# Altium PCB node.PcbDoc
Units mm, origin at the board's own origin, x right, y up, seen from the top; angles counter-clockwise.
Board outline 70.02 x 30.04 mm, 2 copper layers (Top Layer, Bottom Layer); 43 components, 58 nets, 180 pads, 49 vias.
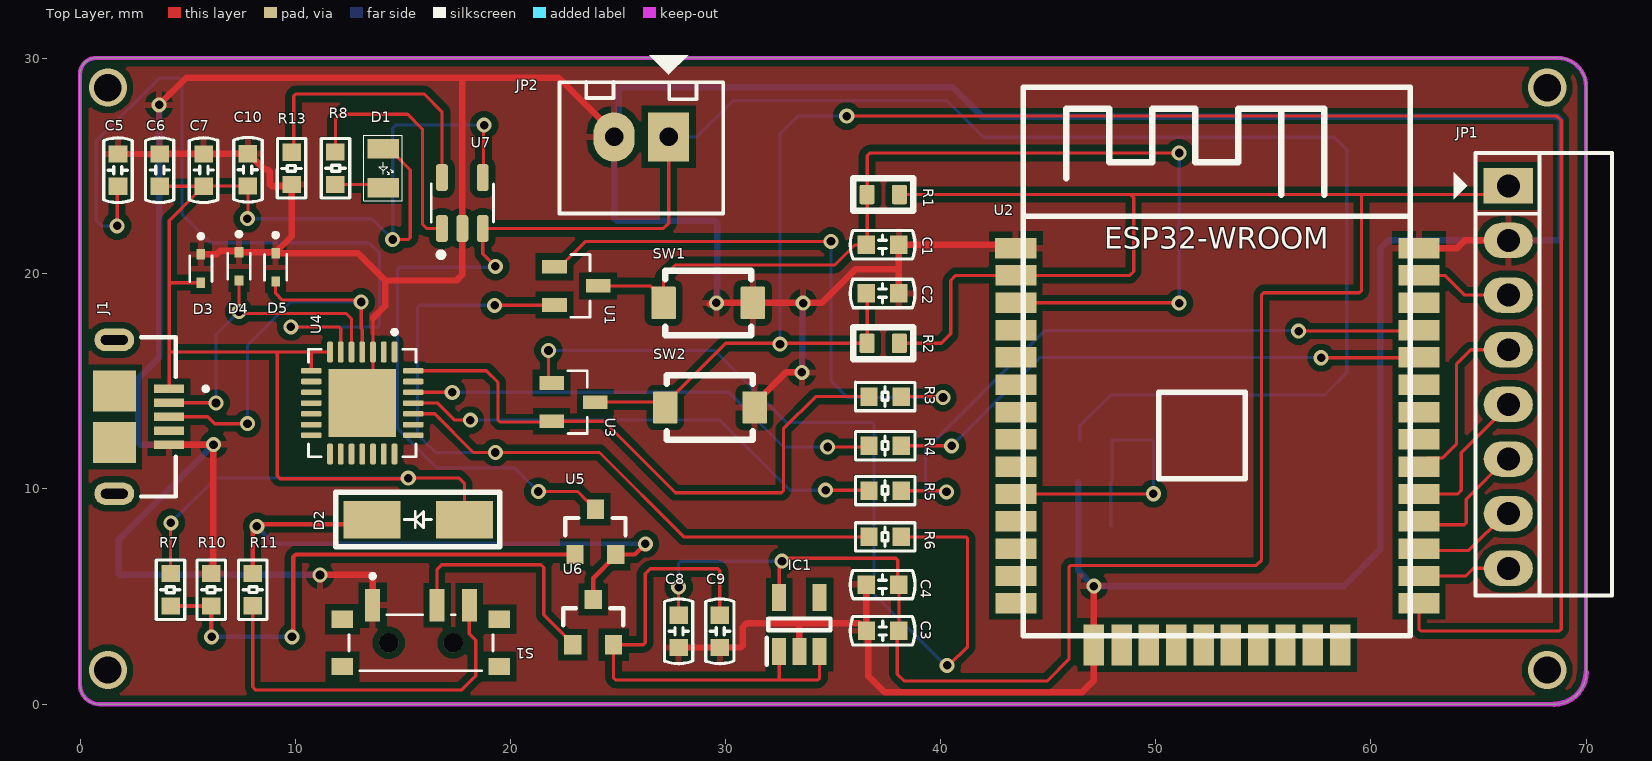
[diagram p0: Top Layer view]
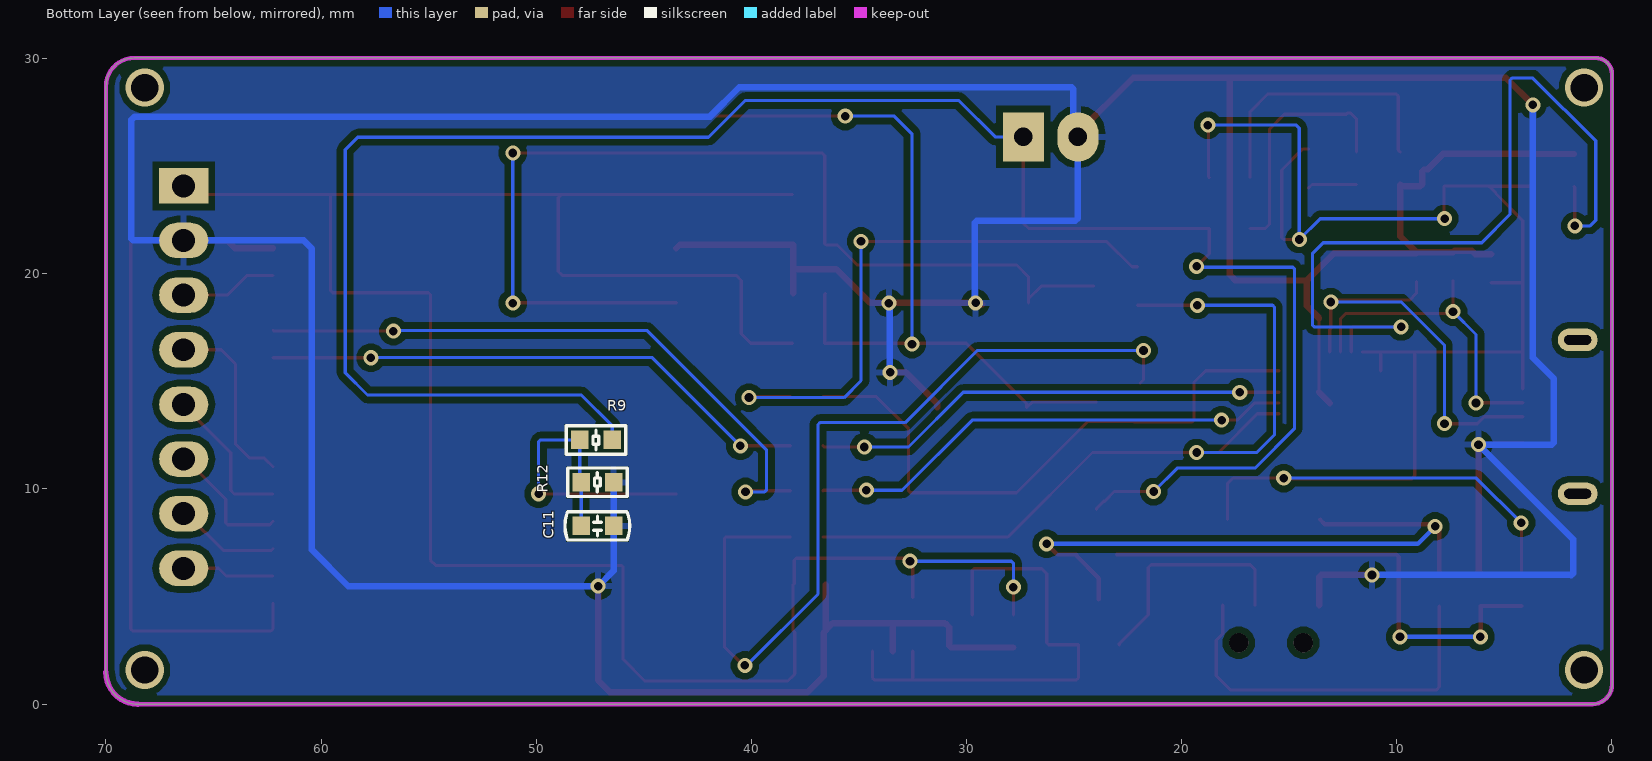
[diagram p1: Bottom Layer view, seen from below]
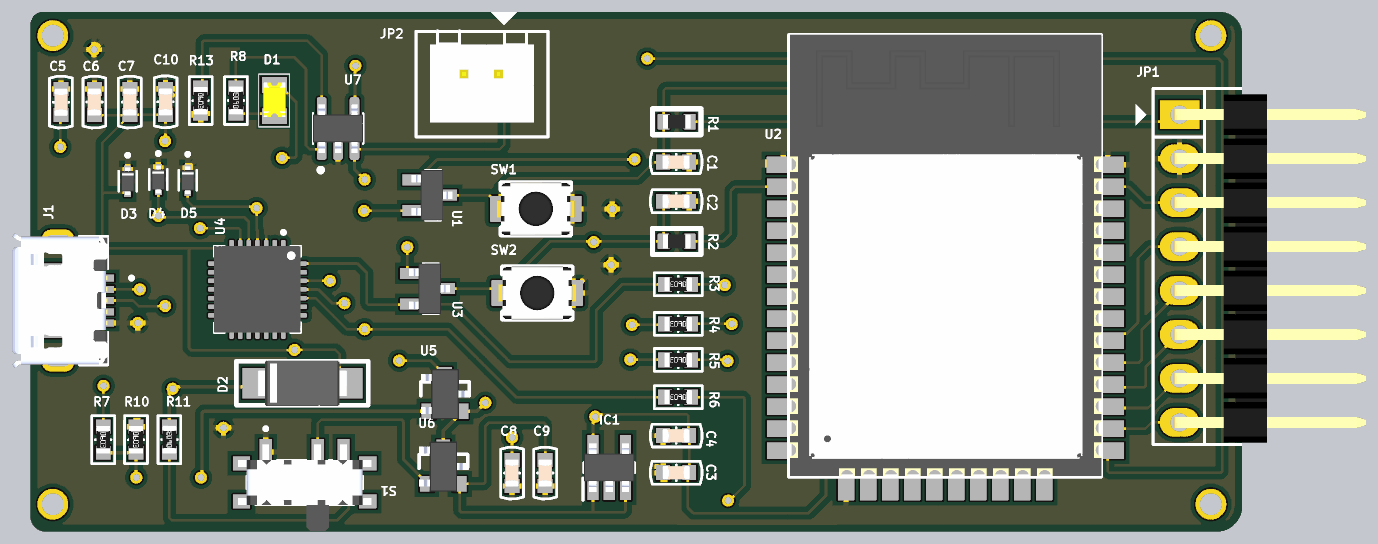
[diagram p2: 3D render of the assembled board from above, using the file's embedded part models]
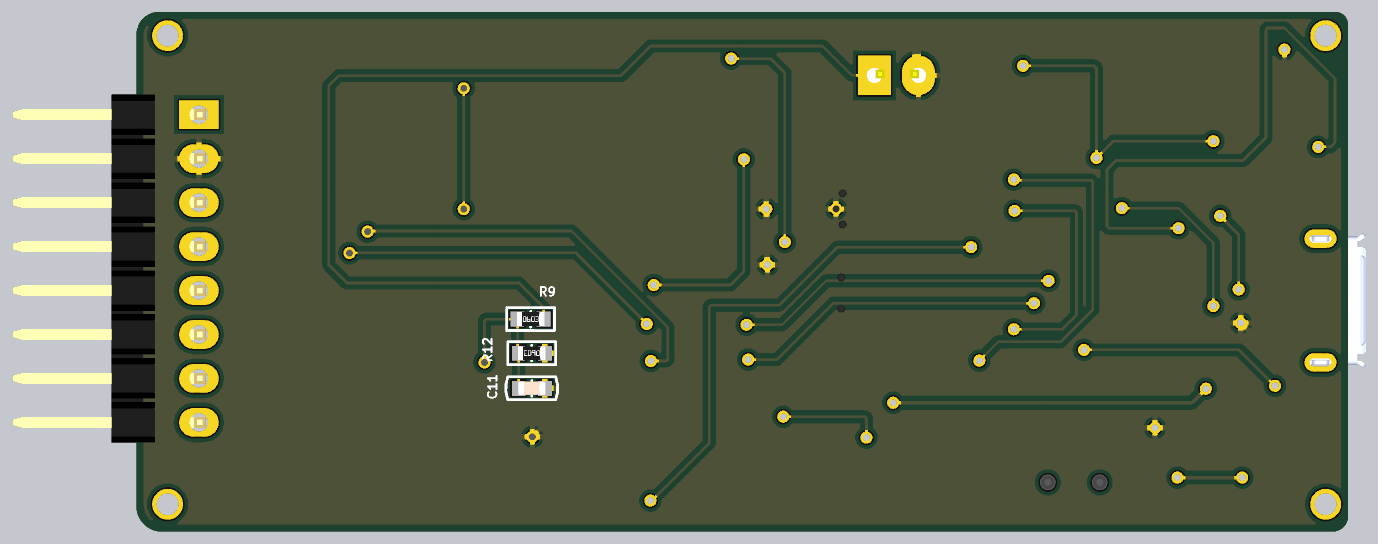
[diagram p3: 3D render of the assembled board from below, using the file's embedded part models]

## Layer stack, top to bottom
Top Solder: solder mask 0.0102, Solder Resist, Dk 3.5
Top Layer: signal copper 0.0356
Dielectric 1: dielectric 0.32, FR-4, Dk 4.8
Bottom Layer: signal copper 0.0356
Bottom Solder: solder mask 0.0102, Solder Resist, Dk 3.5

## Board outline
-0.019,0.91 -0.019,29.278 cw(c0.741,29.278) 0.741,30.038 68.674,30.038 cw(c68.674,28.712) 70,28.712 70,1.483 cw(c68.513,1.483) 68.513,-0.004 0.895,-0.004 cw(c0.895,0.91)

## Design rules (kind name [scope] priority, off if disabled: settings)
Clearance [All] p1: gap=0.3 ignorepadtopadclearanceinfootprint=FALSE
PolygonConnect [All] p1: connectstyle=Relief reliefconductorwidth=0.3 reliefentries=4 polygonreliefangle="90 Angle" airgapwidth=0.3
RoutingVias RoutingVias_Power [InNetClass('Power_class')] p1: holewidth=0.4 width=0.7 viastyle="Through Hole" minholewidth=0.4 minwidth=0.7 maxholewidth=0.6 maxwidth=1.1
RoutingVias [All] p2: holewidth=0.4 width=0.7 viastyle="Through Hole" minholewidth=0.4 minwidth=0.7 maxholewidth=0.4 maxwidth=0.7
SolderMaskExpansion [All] p1: expansion=0.102 istentingtop=FALSE
Width Width_Power [InNetClass('Power_class')] p1: maxlimit=2 minlimit=0.3 preferedwidth=0.5
Width Width_Signal [All] p2: maxlimit=0.5 minlimit=0.15 preferedwidth=0.15
30 further rules are at their usual default settings.

## Components (designator, comment, footprint, x,y, rotation, side; value= is the part's Value field where it differs from the comment)
C1 "0.1uF/50V(10%) 0603" "CAPACITOR 0603" 37.297,21.354 r180 top
C2 "0.1uF/50V(10%) 0603" "CAPACITOR 0603" 37.297,19.09 r180 top
C3 "22uF /10V 0603" "CAPACITOR 0603" 37.3,3.409 r0 top
C4 "0.1uF/50V 0603" "CAPACITOR 0603" 37.297,5.55 r180 top
C5 "1uF 0603" "CAPACITOR 0603" 1.753,24.818 r270 top
C6 "100nF 0603" "CAPACITOR 0603" 3.686,24.821 r90 top
C7 "10uF 0603" "CAPACITOR 0603" 5.731,24.821 r90 top
C8 "10uF /16V 0603" "CAPACITOR 0603" 27.814,3.384 r90 top
C9 "10uF /16V 0603" "CAPACITOR 0603" 29.73,3.384 r90 top
C10 "1uF 0603" "CAPACITOR 0603" 7.793,24.837 r270 top
C11 "100nF 0603" "CAPACITOR 0603" 47.152,8.285 r180 bottom
D1 "LED_0805_YELLOW" LED_0805_YELLOW 14.081,24.907 r180 top
D2 "BAT60B" DIODE_SMA 15.704,8.576 r90 top
D3 "LESD5D5.0CT1G" TVS_LESD5D5.0CT1G 5.605,20.247 r270 top
D4 "LESD5D5.0CT1G" TVS_LESD5D5.0CT1G 7.375,20.347 r270 top
D5 "LESD5D5.0CT1G" TVS_LESD5D5.0CT1G 9.078,20.303 r270 top
IC1 "RT9080-33GJ5" SOT94P280X100-5N 33.429,3.702 r90 top
J1 "USB3090-XX-X_REVE2" GCT_USB3090-XX-X_REVE2 1.58,13.353 r270 top
JP1 "JP8 PIN" JP8H 66.383,24.092 r270 top value=JP7
JP2 "JP2" CON2 27.353,26.365 r180 top value="Connector 2"
R1 "CR03JL7-1K" RESC1608L 37.328,23.685 r0 top value="1K, 1/10W"
R2 "CR03JL7-1K" RESC1608L 37.328,16.77 r0 top value="1K, 1/10W"
R3 "12K 0603" RESISTOR_0603 37.417,14.293 r180 top
R4 "0R 0603" RESISTOR_0603 37.417,12.004 r180 top
R5 "0R 0603" RESISTOR_0603 37.417,9.922 r180 top
R6 "12K 0603" RESISTOR_0603 37.417,7.77 r180 top
R7 "10K 0603" RESISTOR_0603 4.195,5.313 r270 top
R8 "3.3K 0603" RESISTOR_0603 11.86,24.908 r90 top
R9 "1M_0603" RESISTOR_0603 47.219,12.28 r180 bottom
R10 "100K 0603" RESISTOR_0603 6.088,5.313 r270 top
R11 "100K 0603" RESISTOR_0603 8.015,5.316 r90 top
R12 "1.3M_0603" RESISTOR_0603 47.152,10.309 r0 bottom
R13 "1K 0603" RESISTOR_0603 9.823,24.905 r270 top
S1 "SSSS811101" SW_SSSS811101 15.835,2.848 r0 top
SW1 "FLASH" "Button 3x4mm" 29.189,18.651 r0 top value="SW chip 2 pin"
SW2 "FLASH" "Button 3x4mm" 29.27,13.788 r0 top value="SW chip 2 pin"
U1 "S8050" J3Y 23.061,19.439 r270 top
U2 "ESP32-S" ESP32-S 53.19,12.254 r0 top
U3 "S8050" J3Y 22.928,14.037 r270 top
U4 "CP2102-GM" QFN50P500X500X100-29N 13.106,13.993 r270 top
U5 "AO3401" SOT23-3 23.945,7.952 r0 top
U6 "AO3401" SOT23-3 23.842,3.762 r0 top
U7 "TP4054 U1 SOT-23-5" SOT95P280X100-5N 17.762,23.292 r90 top

## Footprints (in the part's own frame and the unit in brackets; to place one, negate y for a bottom-side part, rotate by r counter-clockwise, add the part's x,y. Pads: shape width x height; smd on the part's side, far side on the other; paste and mask are expansions set on the pad)
"Button 3x4mm" [mm] "SMD 3x4mm"
  rrect10% 1.143x1.5 smd: 1(-2.075,0) 2(2.075,0)
  silkscreen extent -2,-1.5 2,1.5, body extent -2.25,-1.55 2.25,1.55, height 2.05
"CAPACITOR 0603" [mm]
  rect 0.806x0.864 smd: 1(-0.753,0) 2(0.753,0)
  silkscreen extent -1.5,-0.66 1.5,0.66, body extent -0.79,-0.4 0.81,0.4, height 0.81
CON2 [mil] "CON2"
  rect 75x90 hole 34: 1(0,0)
  oval 75x90 hole 34: 2(100,0)
  silkscreen extent -100,-150 200,140, body extent -68,-70 168,107, height 236
DIODE_SMA [mm] "Diode SMA"
  rect 1.75x2.65 smd: 1(0,-2.15) 2(0,2.15)
  silkscreen extent -1.27,-3.8 1.27,3.82, body extent -1.3,-2.6 1.3,2.6, height 2.2
ESP32-S [mil]
  rect 61x37.4 smd: 1(-389.27,351.61)
  rect 75x37.4 smd: 1(-382,352) 2(-382,302) 3(-382,252) 4(-382,202) 5(-382,152) 6(-382,102) 7(-382,52) 8(-382,2) 9(-382,-48) 10(-382,-98) 11(-382,-148) 12(-382,-198) 13(-382,-248) 14(-382,-298) 25(356,-298) 26(356,-248) 27(356,-198) 28(356,-148) 29(356,-98) 30(356,-48) 31(356,2) 32(356,52) 33(356,102) 34(356,152) 35(356,202) 36(356,252) 37(356,302) 38(356,352)
  rect 37.4x75 smd: 15(-239.11,-374) 16(-188.4,-374) 17(-138.3,-374) 18(-88.33,-374) 19(-38.34,-374) 20(11.64,-374) 21(61.72,-374) 22(111.63,-374) 23(161.82,-374) 24(211.66,-374)
  silkscreen extent -368,-357 340,647, body extent -366,-356 342,648, height 128
GCT_USB3090-XX-X_REVE2 [mm]
  rect 0.4x1.4 smd: 1(-1.3,2.55) 2(-0.65,2.55) 3(0,2.55) 4(0.65,2.55) 5(1.3,2.55)
  oval 1.05x1.85 hole 0.45 slot 1.25 at 90 deg: SH1(-3.575,0) SH4(3.575,0)
  rect 1.9x2 smd: SH2(-1.2,0) SH3(1.2,0)
  silkscreen extent -3.7,1.25 3.7,4.35, body extent -3.9,-2.64 3.9,2.86, height 2.71
J3Y [mil] "SOT-23-3"
  rect 25x45 smd: 1(-35,-40) 2(35,-40) 3(0,40)
  silkscreen extent -57,-10 58,25, body extent -57,-42 57,52, height 49
JP8H [mil]
  rect 65x90 hole 42: 1(0,0)
  oval 65x90 hole 42: 2(100,0) 3(200,0) 4(300,0) 5(400,0) 6(500,0) 7(600,0) 8(700,0)
  silkscreen extent -60,-100 750,190, body extent -46,-15 746,424, height 49
LED_0805_YELLOW [mm]
  rect 1.45x0.9 smd: 1(0,-0.9) 2(0,0.9)
  silkscreen extent -0.89,-1.53 0.9,1.52, body extent -0.63,-1.06 0.62,0.94, height 1.1
QFN50P500X500X100-29N [mm]
  rrect50% 0.97x0.26 smd: 1(-2.37,1.5) 2(-2.37,1) 3(-2.37,0.5) 4(-2.37,0) 5(-2.37,-0.5) 6(-2.37,-1) 7(-2.37,-1.5) 15(2.37,-1.5) 16(2.37,-1) 17(2.37,-0.5) 18(2.37,0) 19(2.37,0.5) 20(2.37,1) 21(2.37,1.5)
  rrect50% 0.26x0.97 smd: 8(-1.5,-2.37) 9(-1,-2.37) 10(-0.5,-2.37) 11(0,-2.37) 12(0.5,-2.37) 13(1,-2.37) 14(1.5,-2.37) 22(1.5,2.37) 23(1,2.37) 24(0.5,2.37) 25(0,2.37) 26(-0.5,2.37) 27(-1,2.37) 28(-1.5,2.37)
  rect 3.15x3.15 smd paste-0.585: 29(0,0)
  silkscreen extent -3.4,-2.5 2.5,2.5, body extent -2.5,-2.5 2.5,2.5, height 1
RESC1608L [mm] "Chip Resistor, Body 1.6x0.8mm, 1/10W 0603"
  rrect20% 0.7x0.9 smd: 1(-0.75,0) 2(0.75,0)
  silkscreen extent -1.4,-0.75 1.4,0.75, body extent -0.8,-0.4 0.8,0.4, height 0.45
RESISTOR_0603 [mm]
  rect 0.806x0.864 smd: 1(-0.753,0) 2(0.753,0)
  silkscreen extent -1.38,-0.66 1.38,0.66, body extent -0.79,-0.4 0.81,0.4, height 0.47
SOT23-3 [mm]
  rect 0.8x0.9 smd: 1(-0.95,-1) 2(0.95,-1) 3(0,1.1)
  silkscreen extent -1.4,-0.1 1.4,0.7, body extent -1.4,-1.45 1.4,1.45, height 1.25
SOT94P280X100-5N [mm]
  rect 1.25x0.65 smd: 1(-1.25,0.94) 2(-1.25,0) 3(-1.25,-0.94) 4(1.25,-0.94) 5(1.25,0.94)
  silkscreen extent -1.88,-1.45 0.28,1.51, body extent -1.4,-1.45 1.4,1.45, height 1
SOT95P280X100-5N [mm]
  rrect50% 1.26x0.55 smd: 1(-1.185,0.95) 2(-1.185,0) 3(-1.185,-0.95) 4(1.185,-0.95) 5(1.185,0.95)
  silkscreen extent -2.45,-1.45 0.88,1.45, body extent -1.4,-1.45 1.4,1.45, height 1
SW_SSSS811101 [mm]
  rect 0.7x1.5 smd: 1(-2.25,1.75) 2(0.75,1.75) 3(2.25,1.75)
  rect 1x0.8 smd: SH1(-3.65,1.1) SH2(3.65,1.1) SH3(-3.65,-1.1) SH4(3.65,-1.1)
  round 0.9 hole 0.9 unplated: ""(-1.5,0) ""(1.5,0)
  silkscreen extent -3.35,-1.3 3.35,3.2, body extent -3.85,-2.8 3.85,2.2, height 1.4
TVS_LESD5D5.0CT1G [mm]
  rect 0.48x0.4 smd: 1(-0.66,0) 2(0.66,0)
  silkscreen extent -1.6,-0.52 0.6,0.52, body extent -0.8,-0.4 0.8,0.4, height 0.7

## Part data
C1 C2 C3 C4 C5 C6 C7 C8 C9 C10 C11: library part "CAPACITOR 0603", "Generic Capacitor 0603, 1.6x0.8x0.9mm."
D1: "LED 0805 Yellow.", JLCPCB PN=C84261
D2: library part US1M, "High Efficient Recovery Rectifier 1000V 1A SMA", JLCPCB PN=C330229, ComponentLink1Description=Datasheet, Digikey PN=4617-US1MTR-ND, Mouser PN=821-US1M
D3 D4 D5: "Transient Voltage Suppressors for ESD Protection", Package=None, Availability="Not in stock", Check_prices=https://www.snapeda.com/parts/LESD5D5.0CT1G/Leshan+Radio+Co./view-part/?ref=eda, MF="Leshan Radio Co.", MP=LESD5D5.0CT1G, Price=None, SnapEDA_Link=https://www.snapeda.com/parts/LESD5D5.0CT1G/Leshan+Radio+Co./view-part/?ref=snap
IC1: "Linear Voltage Regulator IC Positive Fixed 1 Output 600mA TSOT-23-5", Package="TSOT-23 Richtek", Check_prices=https://www.snapeda.com/parts/RT9080-33GJ5/Richtek+USA+Inc./view-part/?ref=eda, MF="Richtek USA", MP=RT9080-33GJ5, SnapEDA_Link=https://www.snapeda.com/parts/RT9080-33GJ5/Richtek+USA+Inc./view-part/?ref=snap
J1: "USB - micro AB USB 2.0 Receptacle Connector 5 Position Surface Mount, Right Angle; Through Hole, 2.35mm profile, 5 Pins, Horizontal, Bottom mount", Package=None, Check_prices=https://www.snapeda.com/parts/USB3090-30-A/Global+Connector+Technology/view-part/?ref=eda, MF="Global Connector Technology", MP=USB3090-30-A, SnapEDA_Link=https://www.snapeda.com/parts/USB3090-30-A/Global+Connector+Technology/view-part/?ref=snap
JP1: library part JP8
JP2: library part Con2, "Connector 2"
R1 R2: "RES CR 0603 5% 1/10W 1K", ComponentLink1Description=Datasheet, ComponentLink1URL="D:\Dropbox\Datasheets\Passive Components\Resistors\Thick Film Chip Resistor CR.pdf", Unit Price=0.000483
R3 R4 R5 R6 R7 R8 R9 R10 R11 R12 R13: library part RESISTOR_0603, "Generic Resistor 0603."
S1: "Switch Slide SP Side Slide 0.3A 5VDC 10000Cycles Gull Wing SMD T/R", Package=None, Check_prices=https://www.snapeda.com/parts/SSSS811101/ALPS/view-part/?ref=eda, MF=ALPS, MP=SSSS811101, SnapEDA_Link=https://www.snapeda.com/parts/SSSS811101/ALPS/view-part/?ref=snap
SW1 SW2: library part SW2_1, "Switch button 2 pin"
U1 U3: library part J3Y, "TRANSISTOR BIPOLAR (BJT) NPN 25V 500mA SOT-23-3", JLCPCB PN=C2828466, ComponentLink1Description=Datasheet, ComponentLink1URL=https://media.digikey.com/pdf/Data%20Sheets/UTD%20Semi%20PDFs/S8050.pdf, Digikey PN=4518-S8050CT-ND
U4: "USB Bridge, USB to UART USB 2.0 UART Interface 28-QFN (5x5)", Package="QFN-28 Silicon Labs", Check_prices=https://www.snapeda.com/parts/CP2102-GM/Silicon+Labs/view-part/?ref=eda, MF="Silicon Labs", MP=CP2102-GM, SnapEDA_Link=https://www.snapeda.com/parts/CP2102-GM/Silicon+Labs/view-part/?ref=snap
U5 U6: "P-Channel 30 V 4A (Ta) 1.4W (Ta) Surface Mount SOT-23-3", Package="SOT-23-3 Alpha &amp; Omega Semiconductor", Check_prices=https://www.snapeda.com/parts/AO3401/Alpha/view-part/?ref=eda, MF="Alpha & Omega Semiconductor", MP=AO3401, SnapEDA_Link=https://www.snapeda.com/parts/AO3401/Alpha/view-part/?ref=snap
U7: library part LTC4054ES5-4.2#TRMPBF, "Standalone Linear Li-Ion Battery Charger with Thermal Regulation in ThinSOT", Package="SOT-5 Analog Devices", Check_prices=https://www.snapeda.com/parts/LTC4054ES5-4.2%23TRMPBF/Analog+Devices/view-part/?ref=eda, MF="Analog Devices", MP=LTC4054ES5-4.2#TRMPBF, SnapEDA_Link=https://www.snapeda.com/parts/LTC4054ES5-4.2%23TRMPBF/Analog+Devices/view-part/?ref=snap

## Via types
v1: diameter 0.7, hole 0.4, Top Layer to Bottom Layer, 45 vias
v2: diameter 1.778, hole 1.27, Top Layer to Bottom Layer, 4 vias

## Nets (pads, with @x,y where several pads share a name; then routed paths per layer and width w, separated by ;. In a path a pad name is that pad's centre, name@x,y a point inside that pad or via, vN(x,y) a via of type N, cw(c..) or ccw(c..) an arc to the next point about the centre after c; other vN are vias at no path point)
#EN: C1.2 R1.1 SW1.1 U1.3 U2.3 | length 48.1
  Top Layer w0.15: U1.3 26.504,19.439 SW1.1@27.114,18.829 ; SW1.1 SW1.1@27.114,18.829 ; U2.3 51.257,18.655 51.274,18.638 v1@51.292,18.621 ; v1(51.083,25.615) 36.698,25.615 36.578,25.495 R1.1 36.578,21.388 36.531,21.341 36.004,21.341 35.075,20.412 27.663,20.412 27.114,19.864 SW1.1@27.114,18.829
  Bottom Layer w0.15: v1(51.083,25.615) 51.083,18.978 51.274,18.787 v1@51.274,18.638
  other v1: 51.083,18.638
BUSY: JP1.8 U2.26 | length 4.3
  Top Layer w0.15: U2.26 64.409,5.955 64.766,6.312 JP1.8
CMD: U2.19
CS: JP1.5 U2.29 | length 6.9
  Top Layer w0.15: U2.29 64.031,9.765 64.2,9.934 64.2,11.679 66.383,13.861 JP1.5
CTS: U4.23
D/C: JP1.6 U2.28 | length 6.1
  Top Layer w0.15: U2.28 62.393,8.334 64.345,8.334 64.433,8.422 64.433,9.53 66.295,11.392 JP1.6
DCD: U4.1
DSR: U4.27
DTR: R3.2 U3.2 U4.28 | length 28.4
  Top Layer w0.15: U4.28 18.879,15.493 19.418,14.954 19.418,13.199 19.506,13.111 21.912,13.111 U3.2@22.204,13.111 ; U3.2 22.204,13.148 24.345,13.148 27.67,9.823 32.597,9.823 32.684,9.911 32.684,12.793 34.185,14.293 R3.2
GND: C1.1 C2.1 C3.1 C4.2 C5.1 C6.2 C7.2 C8.1 C9.1 C10.1 C11.2 D3.1 D4.1 D5.1 IC1.2 J1.5 JP1.2 JP2.2 R10.1 R12.1 R13.2 S1.1 SW1.2 SW2.2 U2.1 U2.15 U2.38 U4.3 U4.29 U7.2 | length 277.5
  Top Layer w0.15: U4.29@13.606,14.493 U4.3 13.606,17.943
  Top Layer w0.3: C5.1 3.683,25.571 C6.2 C7.2 7.777,25.574 C10.1 7.822,25.59 8.561,24.851 8.72,24.851 8.807,24.763 8.807,24.156 8.897,24.066 9.738,24.066 R13.2 9.823,21.749 9.078,21.003 D5.1 ; v1(3.663,27.855) 4.93,29.122 17.695,29.122 ; J1.5 6.182,12.053 v1(6.189,12.061) 6.189,6.168 R10.1 ; D3.1 6.346,20.907 6.516,21.077 7.305,21.077 D4.1 9.033,21.007 D5.1 ; v1(11.143,6.001) 13.497,6.001 13.585,5.914 S1.1 ; U4.29 U4.29@13.606,14.493 ; 13.606,17.943 14.182,18.52 14.182,19.69 ; JP2.2 24.813,26.555 22.246,29.122 17.695,29.122 ; C8.1 C9.1 30.707,2.631 30.794,2.718 30.794,3.565 30.995,3.766 33.517,3.766 ; v1@29.271,18.587 29.334,18.651 SW1.2 34.477,18.651 36.048,20.222 38.05,20.222 ; SW2.2 31.345,13.967 32.808,15.429 33.527,15.429 v1(33.54,15.417) ; IC1.2 33.429,3.678 33.517,3.766 ; C4.2 C3.1@36.544,3.441 ; C2.1 38.05,20.222 ; U2.1@43.487,21.195 43.328,21.354 C1.1 38.05,20.222 ; v1(47.117,5.482) U2.15 47.117,1.096 46.567,0.546 37.388,0.546 36.639,1.294 36.639,3.317 C3.1 36.544,3.412 C3.1@36.544,3.441 ; U2.38 64.004,21.195 64.361,21.552 JP1.2 ; D5.1 12.909,20.963 14.182,19.69 ; 14.182,19.69 17.492,19.69 17.762,19.96 U7.2 17.762,29.056 17.695,29.122 ; 33.517,3.766 36.219,3.766 C3.1@36.544,3.441
  Bottom Layer w0.3: v1@3.682,27.874 v1(3.663,27.855) 3.663,16.102 2.695,15.134 2.695,12.149 2.783,12.061 v1(6.189,12.061) 1.795,7.667 1.795,6.073 1.875,5.993 1.883,6.001 v1(11.143,6.001) ; v1(29.571,18.648) 29.599,18.675 29.599,22.379 29.511,22.467 24.94,22.467 24.813,22.595 JP2.2 25.023,26.575 25.023,28.584 25.111,28.672 40.551,28.672 41.913,27.31 68.663,27.31 68.812,27.161 68.812,21.64 68.724,21.552 JP1.2 60.802,21.552 60.428,21.178 60.428,7.181 58.728,5.482 v1(47.117,5.482) 46.399,6.2 R12.1 ; v1(33.54,15.417) 33.571,15.448 33.571,18.606 v1(33.603,18.637)
IO0: C2.2 R2.1 SW2.1 U2.25 U3.3 | length 94.6
  Top Layer w0.15: U3.3 26.946,14.037 SW2.1 27.195,13.967 29.998,16.77 R2.1 36.578,19.056 C2.2 ; v1@35.516,27.47 35.653,27.333 68.635,27.333 68.841,27.127 68.841,3.484 68.753,3.396 62.32,3.396 62.233,3.484 U2.25
  Bottom Layer w0.15: v1(32.529,16.735) 32.529,26.513 33.349,27.333 v1(35.629,27.333)
IO2: U2.24
IO12: U2.14
IO13: U2.16
IO14: U2.13
IO15: U2.23
IO19: U2.31
IO21: U2.33
IO22: U2.36
IO25: C11.1 R9.1 R12.2 U2.10 | length 14.8
  Top Layer w0.15: U2.10 49.872,9.765 v1(49.885,9.778) v1@49.898,9.79
  Bottom Layer w0.15: C11.1 R12.2 47.972,10.376 R9.1 49.797,12.28 49.885,12.192 v1(49.885,9.778)
IO26: U2.11
IO27: U2.12
IO32: U2.8
IO33: U2.9
IO34: U2.6
IO35: U2.7
IO36: U2.4
IO39: U2.5
MOSI: JP1.3 U2.37 | length 4.5
  Top Layer w0.15: U2.37 63.437,19.925 64.351,19.012 JP1.3
NC: U2.32
NetC5_2: C5.2 U4.6 | length 39
  Top Layer w0.15: v1(1.712,22.228) 1.712,24.024 C5.2 ; v1@9.781,17.541 v1(9.787,17.534) 12.018,17.534 12.106,17.446 U4.6
  Bottom Layer w0.15: v1(1.712,22.228) 1.004,22.228 0.745,22.488 0.745,26.184 3.661,29.101 4.639,29.101 4.727,29.013 4.727,22.762 6.042,21.446 13.404,21.446 13.914,20.936 13.914,17.622 13.827,17.534 v1(9.787,17.534)
NetD1_2: D1.2 R8.1 | length 2.3
  Top Layer w0.15: R8.1 13.933,24.155 D1.2
NetD2_2: D2.2 R11.2 U5.2 U6.3 | length 30.5
  Top Layer w0.2: R11.2 8.015,8.243 8.132,8.361 13.339,8.361 D2.2 ; U6.3 23.842,5.849 24.895,6.902 U5.2 25.773,6.952 v1(26.268,7.447)
  Bottom Layer w0.2: v1@8.152,8.339 8.205,8.285 v1(8.205,8.259) 9.016,7.447 v1(26.268,7.447)
NetR3_1: R3.1 U1.1 | length 27.3
  Top Layer w0.15: U1.1 22.299,20.328 23.471,21.5 34.89,21.5 v1(34.898,21.508) ; R3.1 40.061,14.293 v1(40.104,14.249)
  Bottom Layer w0.15: v1(34.898,21.508) 34.898,15.036 35.685,14.249 v1(40.104,14.249)
NetR6_1: R6.1 U3.1 | length 40.2
  Top Layer w0.15: v1(21.763,16.438) 21.763,15.075 U3.1 ; R6.1 41.159,7.77 41.247,7.683 41.247,2.666 40.376,1.796 v1(40.295,1.796)
  Bottom Layer w0.15: v1(21.763,16.438) 29.493,16.438 32.846,13.085 36.81,13.085 36.898,12.997 36.898,5.112 40.214,1.796 v1(40.295,1.796)
NetR7_2: R7.2 R10.2 U5.1 | length 23.8
  Top Layer w0.2: R7.2 R10.2 6.088,3.143 v1(6.106,3.125) ; v1@9.783,3.25 9.9,3.367 9.9,6.835 10.017,6.952 U5.1
  Bottom Layer w0.2: v1(6.106,3.125) v1(9.841,3.125)
NetR8_2: R8.2 U7.1 | length 11.4
  Top Layer w0.15: R8.2 11.86,27.189 12.152,27.481 12.276,27.481 12.336,27.422 15.214,27.422 15.907,26.728 15.907,22.307 16.108,22.107 U7.1
NetR11_1: R11.1 S1.3 | length 17.9
  Top Layer w0.15: R11.1 8.015,0.793 8.157,0.651 17.712,0.651 18.381,1.321 18.381,2.968 18.085,3.264 S1.3
NetR13_1: R13.1 U7.5 | length 13
  Top Layer w0.15: R13.1 9.918,25.752 9.918,28.273 10.006,28.361 15.988,28.361 16.812,27.538 U7.5
NetS1_2: S1.2 U6.1 | length 10.9
  Top Layer w0.15: S1.2 16.585,6.259 16.803,6.477 21.418,6.477 21.545,6.35 21.545,4.159 22.892,2.812 U6.1
RES: JP1.7 U2.27 | length 4.9
  Top Layer w0.15: U2.27 62.315,7.142 64.549,7.142 66.259,8.852 JP1.7
RI: U4.2
RTS: R6.2 U1.2 U4.24 | length 39.9
  Top Layer w0.15: U4.24 16.475,13.493 18.273,11.695 v1(19.296,11.695) 24.135,11.695 28.06,7.77 R6.2 ; v1(19.257,18.537) 22.032,18.537 U1.2
  Bottom Layer w0.15: v1(19.257,18.537) 15.764,18.537 15.676,18.449 15.676,12.514 16.495,11.695 v1(19.296,11.695)
RXD: R5.2 U4.25 | length 22.9
  Top Layer w0.15: U4.25 16.611,13.993 17.405,13.2 v1(18.13,13.2) ; v1(34.647,9.941) 36.644,9.941 R5.2
  Bottom Layer w0.15: v1(18.13,13.2) 29.734,13.2 32.992,9.941 v1(34.647,9.941)
RXD0: R4.1 U2.34 | length 25.8
  Top Layer w0.15: R4.1 v1(40.507,12.004) v1@40.527,12.023 ; v1(57.685,16.098) 62.216,16.098 U2.34
  Bottom Layer w0.15: v1(40.507,12.004) 44.618,16.115 57.668,16.115 v1(57.685,16.098)
SCK: JP1.4 U2.30 | length 8.6
  Top Layer w0.15: U2.30 62.632,11.435 63.32,11.435 63.979,12.093 63.979,15.813 64.637,16.472 JP1.4
SD0: U2.21
SD1: U2.22
SD2: U2.17
SD3: U2.18
TXD: R4.2 U4.26 | length 22.4
  Top Layer w0.15: U4.26 v1(17.289,14.493) v1@17.296,14.486 ; v1(34.74,11.951) 36.611,11.951 R4.2
  Bottom Layer w0.15: v1(17.289,14.493) 30.149,14.493 32.69,11.951 v1(34.74,11.951) 34.828,12.039 v1@34.828,12.055
TXD0: R5.1 U2.35 | length 30.3
  Top Layer w0.15: R5.1 40.206,9.922 v1(40.266,9.862) ; v1(56.635,17.337) 62.184,17.337 U2.35
  Bottom Layer w0.15: v1(40.266,9.862) 39.382,9.862 39.285,9.959 39.285,11.807 44.85,17.372 56.6,17.372 v1(56.635,17.337)
USB_DN: D4.2 J1.2 U4.5 | length 15.2
  Top Layer w0.15: J1.2 6.301,14.003 v1(6.309,13.995) ; D4.2 v1(7.375,18.245) 7.463,18.157 12.365,18.157 12.606,17.917 U4.5
  Bottom Layer w0.15: v1(6.309,13.995) 6.309,17.179 v1(7.375,18.245)
USB_DP: D5.2 J1.3 U4.4 | length 20.6
  Top Layer w0.15: J1.3 5.925,13.353 6.245,13.034 v1(7.771,13.034) ; D5.2 9.078,19.096 9.393,18.78 12.968,18.78 v1(13.056,18.693) 13.056,17.462 13.106,17.412 U4.4
  Bottom Layer w0.15: v1(7.771,13.034) 7.771,16.686 9.778,18.693 v1(13.056,18.693)
VBAT: JP2.1 R9.2 U5.3 U7.3 | length 95.3
  Top Layer w0.15: v1(19.298,20.344) 18.712,20.931 U7.3 27.108,22.107 27.353,22.351 JP2.1 ; v1(21.291,9.88) 23.117,9.88 23.57,9.427 23.62,9.427 23.945,9.102 U5.3
  Bottom Layer w0.15: v1@19.339,20.384 v1(19.298,20.344) 19.258,20.304 14.828,20.304 14.741,20.216 14.741,12.813 16.583,10.97 20.201,10.97 v1(21.291,9.88) ; JP2.1 28.66,26.365 30.354,28.058 40.281,28.058 41.988,26.352 58.297,26.352 58.877,25.772 58.877,15.405 57.84,14.368 47.896,14.368 46.466,12.937 R9.2
VCC: C6.1 C7.1 C10.2 D1.1 D2.1 D3.2 J1.1 R7.1 U4.7 U4.8 U7.4 | length 81
  Top Layer w0.15: C6.1 C7.1@5.702,24.068 ; J1.1 4.13,16.333 ; R7.1 4.195,8.41 v1(4.21,8.425) ; D3.2 4.218,19.587 4.13,19.499 ; v1(7.769,22.563) 7.793,22.587 C10.2 5.747,24.084 C7.1 C7.1@5.702,24.068 ; U4.8 10.736,16.34 10.713,16.363 ; U4.7 10.713,16.363 ; D1.1 14.356,25.807 15.335,24.828 15.335,21.684 15.247,21.596 v1(14.52,21.596) v1@14.451,21.665 ; D2.1 17.854,10.256 17.606,10.503 v1(15.246,10.503) 15.216,10.474 9.294,10.474 9.151,10.618 9.151,16.363 ; U7.4 18.74,24.505 18.74,26.886 v1(18.769,26.915) ; 4.13,16.333 4.13,19.499 ; 4.13,16.333 4.16,16.363 9.151,16.363 ; 4.13,19.499 4.13,22.467 5.374,23.711 5.374,23.74 C7.1@5.702,24.068 ; 9.151,16.363 10.713,16.363
  Bottom Layer w0.15: v1(4.21,8.425) 6.288,10.503 v1(15.246,10.503) ; v1(7.769,22.563) 13.554,22.563 v1(14.52,21.596) 14.52,26.772 14.663,26.915 v1(18.769,26.915)
VDD3V3: C3.2 C4.1 C8.2 IC1.5 JP1.1 R1.2 R2.2 U2.2 | length 109.1
  Top Layer w0.15: C8.2 v1(27.814,5.436) v1@27.817,5.439 ; IC1.5 32.489,6.509 v1(32.622,6.641) 32.754,6.774 37.909,6.774 37.997,6.686 37.997,5.603 C4.1 38.053,5.547 C3.2 37.974,3.33 37.974,1.393 38.296,1.071 44.949,1.071 45.956,2.079 45.956,6.356 46.044,6.444 54.667,6.444 54.916,6.693 ; R2.2 40.022,16.77 40.462,17.21 40.462,19.69 40.697,19.925 U2.2 48.785,19.925 48.968,20.108 48.968,23.541 48.824,23.685 ; R1.2 48.824,23.685 ; 54.916,6.694 54.916,19.037 55.004,19.125 59.466,19.125 59.554,19.213 59.554,23.685 ; JP1.1 65.976,23.685 59.554,23.685 ; 48.824,23.685 59.554,23.685
  Bottom Layer w0.15: v1(27.814,5.436) 27.814,6.553 27.902,6.641 v1(32.622,6.641)
VHI: C9.2 IC1.1 IC1.3 U6.2 | length 24.2
  Top Layer w0.15: C9.2 29.73,6.205 29.642,6.293 26.487,6.293 26.259,6.064 26.259,2.85 26.171,2.762 U6.2 24.792,1.208 24.88,1.121 32.489,1.121 ; IC1.1 32.489,1.121 ; IC1.3 34.369,1.208 34.281,1.121 32.489,1.121
pads on no net: IC1.4 J1.4 J1.SH1 J1.SH2 J1.SH3 J1.SH4 S1. S1.SH1 S1.SH2 S1.SH3 S1.SH4 U2.20 U4.9 U4.10 U4.11 U4.12 U4.13 U4.14 U4.15 U4.16 U4.17 U4.18 U4.19 U4.20 U4.21 U4.22
copper on no net:
  other v2: 1.282,1.584 68.194,1.584 1.282,28.657 68.194,28.657

## Polygon pours and split planes (outlines as drawn)
GND on Bottom Layer "GND_L02_P000" (solid, remove dead copper, pour order 0): 70,0 70,30 0,30 0,0
GND on Top Layer "GND_L01_P001" (solid, remove dead copper, pour order 1): 0,0 70,0 70,30 0,30

## Keep-outs
Keep-Out Layer:
  lines w0.2: 68.513,-0.004 0.895,-0.004 cw(c0.895,0.91) -0.019,0.91 -0.019,29.278 cw(c0.741,29.278) 0.741,30.038 23.944,30.038 68.674,30.038 cw(c68.674,28.712) 70,28.712 70,1.483
  lines w0.254: 68.513,-0.004 ccw(c68.513,1.483) 70,1.483

## Dimensions
0,0 to 70,0 on Mechanical 10
70,30 to 70,0 on Mechanical 10

## Text inside footprints (layer, text, board x,y; h text height)
J1: Mechanical 13 "PCB Edge" at 0.539,8.259 h0.67 r270
R1: Mechanical 1 "R?" at 37.328,23.685 h0.5
R2: Mechanical 1 "R?" at 37.328,16.77 h0.5
U2: Top Overlay "ESP32-WROOM" at 47.591,21.174 h1